# Altium PCB hat_PCB.PcbDoc (part 2 of 2)
Units mm, origin at the board's own origin, x right, y up, seen from the top; angles counter-clockwise.
Board outline 64 x 85 mm, 4 copper layers (Top Side, Ground Plane, Power Plane, Bottom Side), stack 0.844 mm thick; 87 components, 68 nets, 317 pads, 94 vias.
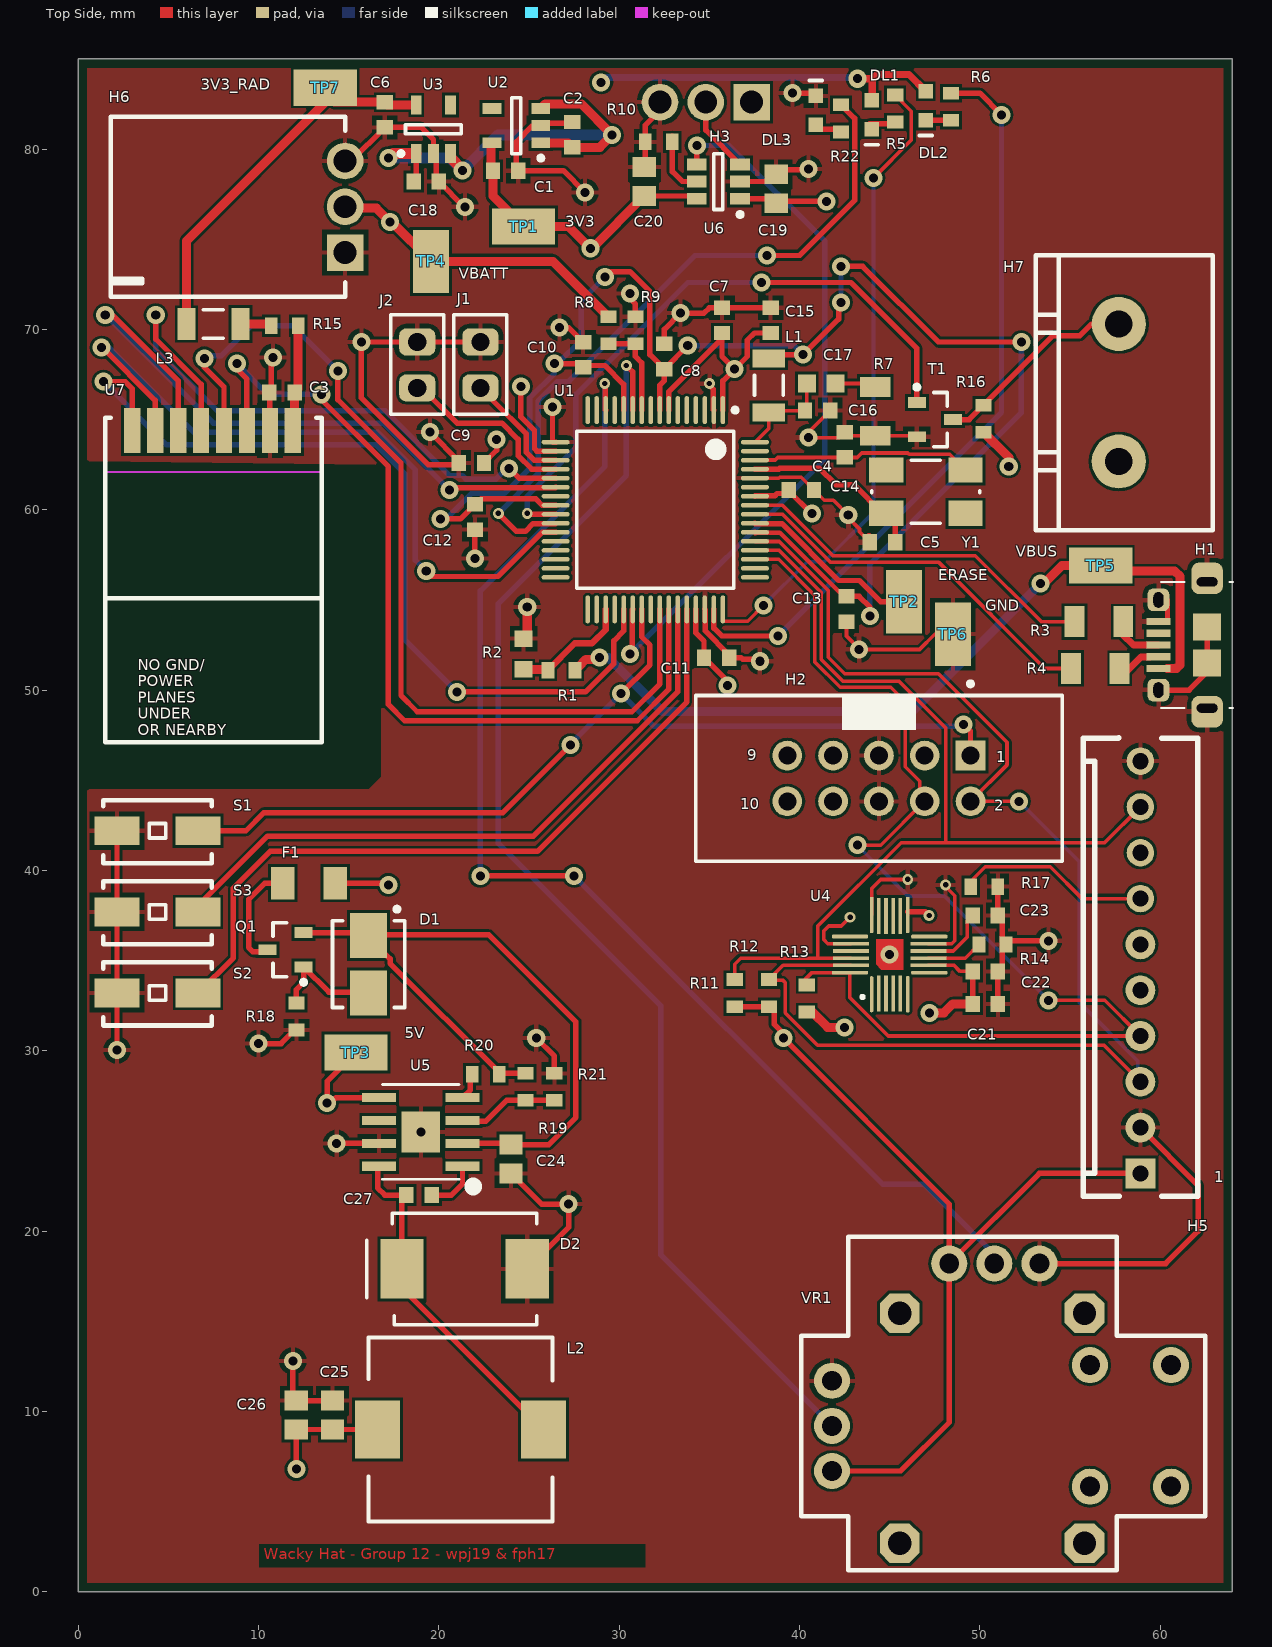
[diagram p0: Top Side view]

## Other copper (continued)
Power Plane (plane layer: these items are gaps in the copper): (continued)
  lines w0.254: 0.1,27.6 8.259,27.6 11.359,30.7 20.529,30.7 23.9,34.071 ; 23.9,34.2 23.9,58 22.3,59.6 22.3,83.1 24.029,84.829 ; 23.9,34.5 23.9,34.071 ; 30.2,84.9 30.5,84.9 ; 31.85,84.95 29.6,82.7 28.05,81.15 28.05,77.65 35.8,69.9 40.6,69.9 46.6,63.9 46.6,49.029 46.6,48.2 52,42.8 52,30.5 49.5,28 29.971,28 23.9,34.071

## Silkscreen, mask and mechanical layers (free items; w line width, h text height)
Board Outline:
  the board outline again, w0.254

## Dimensions
64,86 to 0,86 on Mechanical 1
65,85 to 65,0 on Mechanical 1

## Text inside footprints (layer, text, board x,y; h text height)
H1: Mechanical 1 "PCB Edge" at 64.87,50.35 h0.6 r90
H2: Top Overlay "9" at 37.1,46.1 h0.6; Top Overlay "10" at 36.7,43.4 h0.6; Top Overlay "1" at 50.9,46 h0.6; Top Overlay "2" at 50.8,43.3 h0.6
H5: Top Overlay "1" at 63,22.7 h0.6
U5: Mechanical 13 "*" at 20.93,24.344 h0.6 r180
U7: Top Overlay "NO GND/ / POWER / PLANES / UNDER / OR NEARBY" at 3.3,47.5 h0.6